# Altium PCB NNLightSwitcher.PcbDoc (part 3 of 3)
Units mil, origin at the board's own origin, x right, y up, seen from the top; angles counter-clockwise.
Board outline 1590 x 2535 mil, 2 copper layers (Top Layer, Bottom Layer); 347 components, 370 nets, 1639 pads, 0 vias.
Unrouted connection lines stored in the file: 1035.
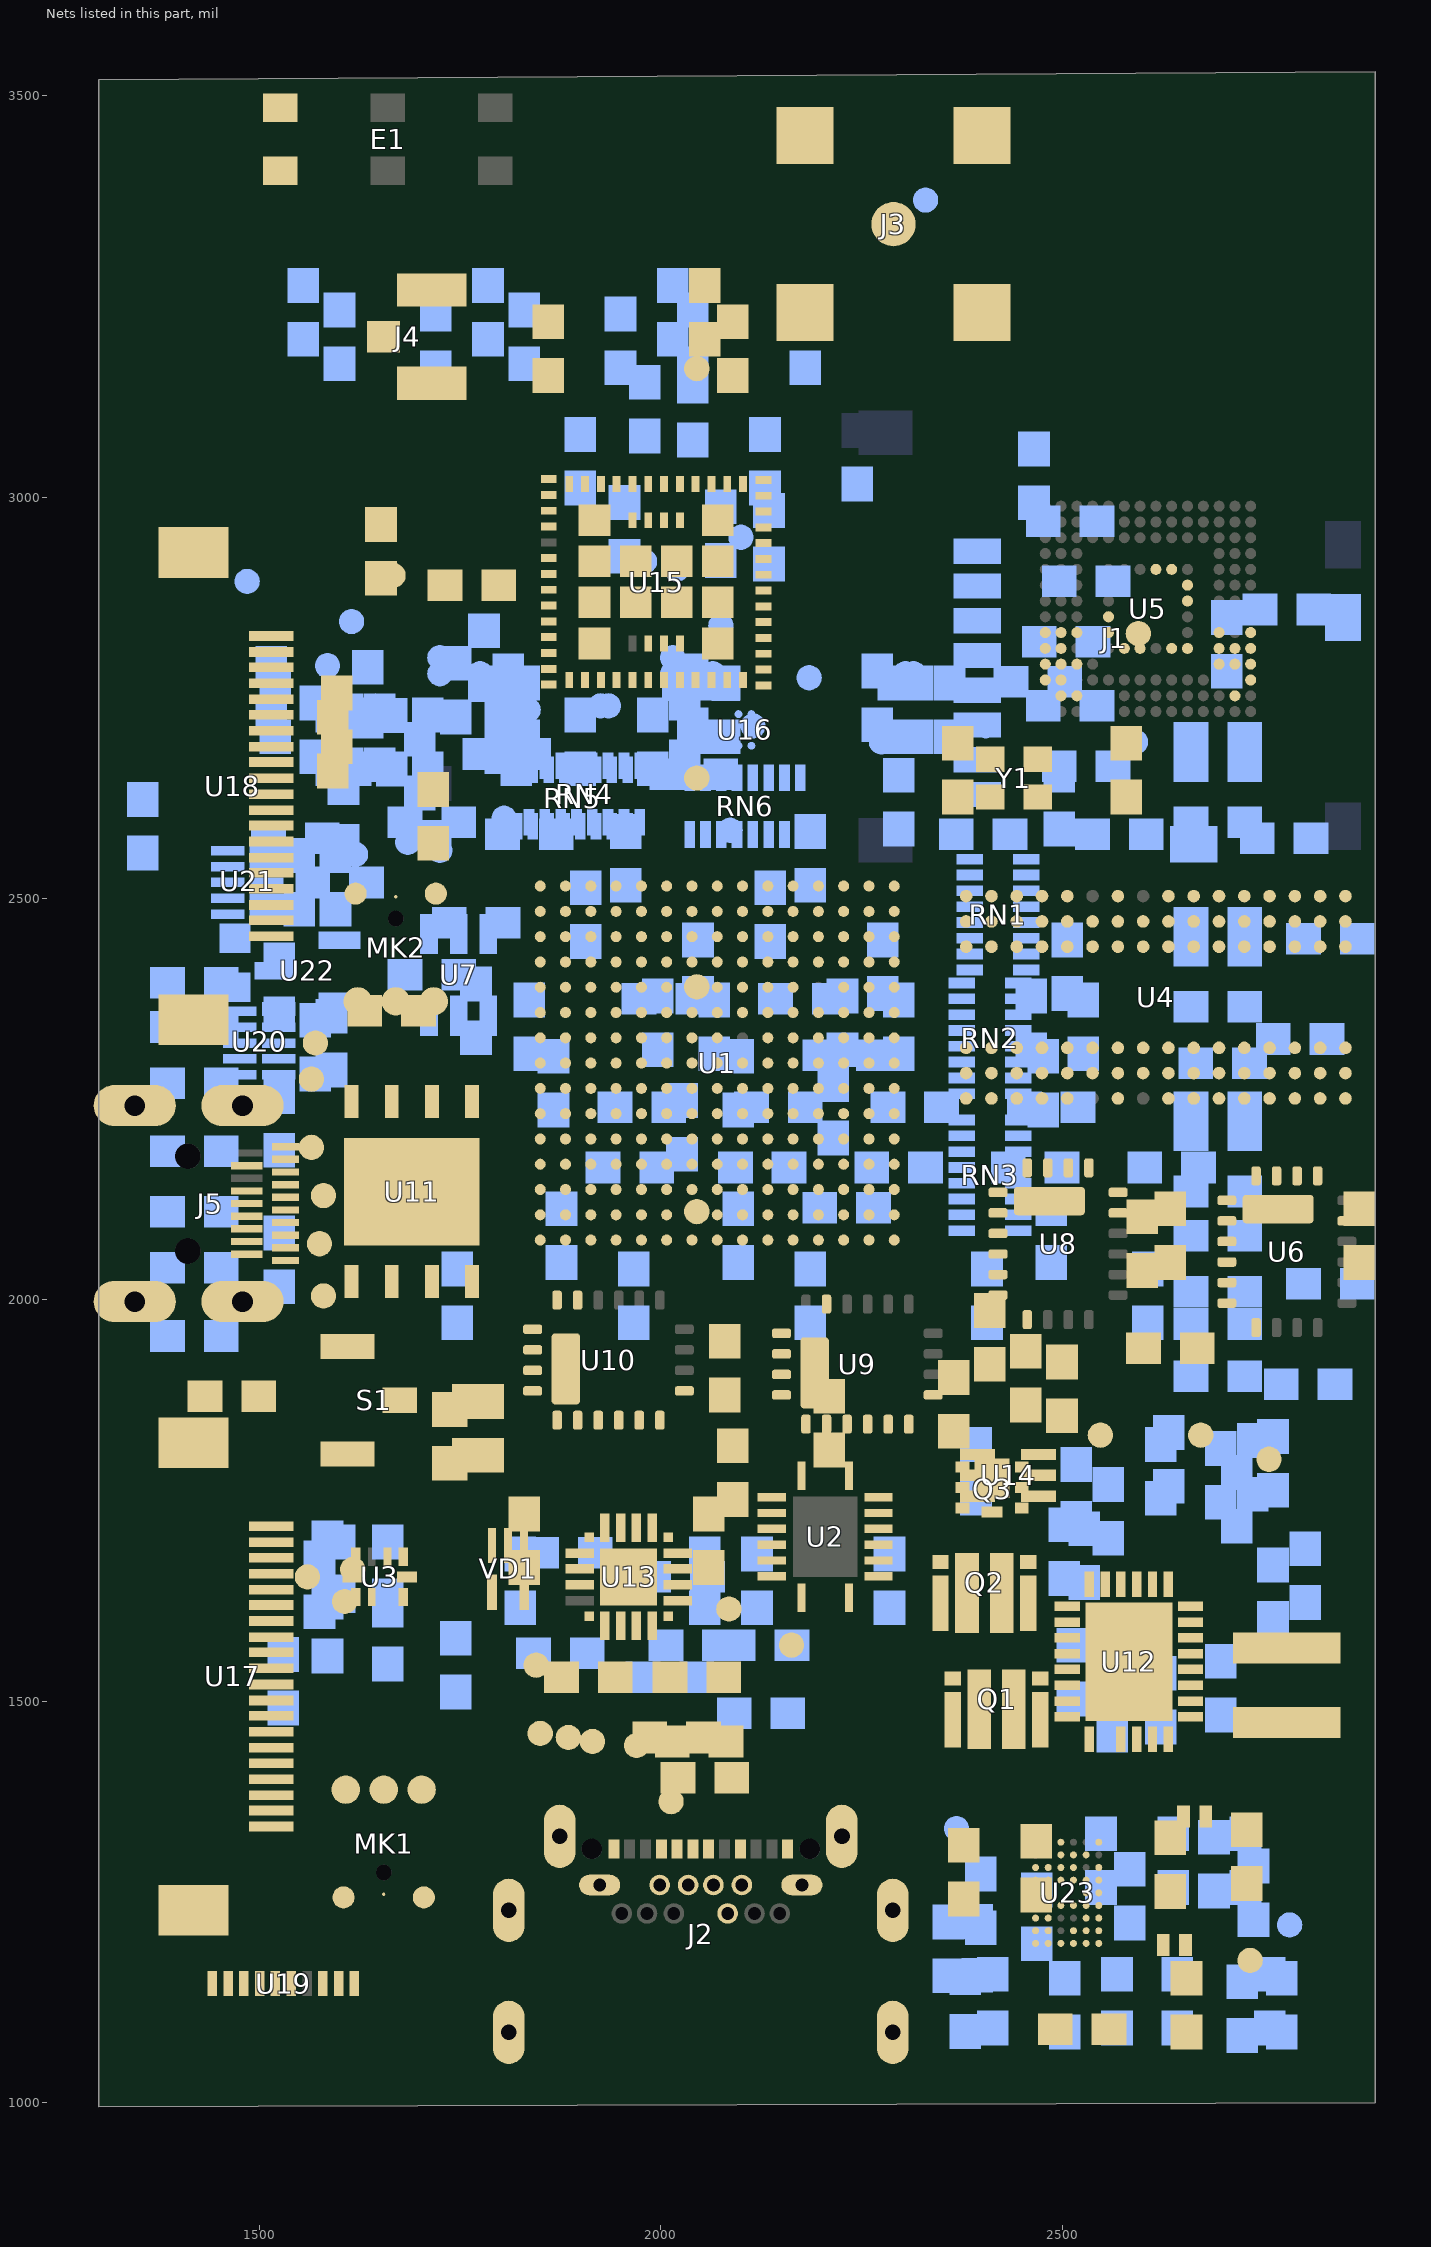
[diagram p2: the nets of this part, all layers, seen from the top]

## Nets (pads, with @x,y where several pads share a name; then routed paths per layer and width w, separated by ;. In a path a pad name is that pad's centre, name@x,y a point inside that pad or via, vN(x,y) a via of type N, cw(c..) or ccw(c..) an arc to the next point about the centre after c; other vN are vias at no path point) (continued)
"TMS Zynq": U1.L9 U19.2
"UART0 RXD": R53.2 U1.A13
"UART0 TXD": R54.2 U1.D14
"UART1 RXD": TP27.1 U1.C13 U15.45
"UART1 TXD": TP26.1 U1.A12 U15.46
"UART CTS USB": R56.2
"UART nCTS BLE": TP24.1 U15.48
"UART nRTS BLE": TP25.1 U15.47
"UART RTS USB": R55.2
USB_D_N: J2.A7 J2.B7 R67.1 VD1.5
USB_D_P: J2.A6 J2.B6 R66.1 VD1.3
VBATT: Q3.1 Q3.2 Q3.5 Q3.6 Q3.7 R65.1 U12.16
"VCC 1.0V": C29.1 C30.1 C31.1 C32.1 C33.1 C34.1 C35.1 R32.2 R44.2 TP10.1 U1.E10 U1.F9 U1.G6 U1.G10 U1.H5 U1.J10 U1.K5 U1.L10
"VCC 1.8V": C10.1 C11.1 C12.1 C13.1 C14.1 C15.1 C23.1 C24.1 L1.2 L3.1 R9.2 R41.2 TP9.1 U1.E6 U1.F11 U1.H9 U1.H15 U1.J6 U1.J8 U1.K9 U1.L6 U6.20
"VCC 1.35V": C4.1 C5.1 C6.1 C7.1 C8.1 R5.1 R6.2 R22.2 R40.2 TP11.1 U1.B3 U1.E4 U1.F1 U1.J2 U1.M3 U1.R4
"VCC 1.35V DDR3": C40.1 C42.1 C43.1 C44.1 C45.1 C46.1 C47.1 C48.1 C49.1 C50.1 C51.1 C52.1 C53.1 R22.1 U4.A1 U4.A8 U4.B2 U4.C1 U4.C9 U4.D2 U4.D9 U4.E9 U4.F1 U4.G7 U4.H2 U4.H9 U4.K2 U4.K8 U4.N1 U4.N9 U4.R1 U4.R9
"VCC 3.3V": C9.1 C16.2 C17.2 C18.1 C19.1 C21.1 C22.1 C69.1 C77.1 C78.1 C79.1 C80.1 C81.1 L2.2 R1.2 R10.2 R11.2 R30.1 R31.1 R33.2 R34.2 R35.2 R52.2 R64.2 R104.2 R107.1 R110.1 R111.1 R112.1 R113.1 R116.1 TP8.1 U1.A6 U1.B11 U1.B13 U1.C10 U1.D7 U1.E14 U1.F6 U1.G4 U1.H4 U1.J4 U1.K8 U2.16 U7.6 U11.8 U12.2 U17.21 U18.17 U18.18 U22.2
"VCC 3.3V eMMC": C54.1 C55.1 C56.1 C57.1 C58.1 C59.1 R30.2 U5.C2 U5.C6 U5.E6 U5.F5 U5.J10 U5.K9 U5.M4 U5.N4 U5.P3 U5.P5
"VCC 3.3V QSPI": R46.2 R51.2 R52.1
"VCC 3.3V SD": C60.1 L5.1 R23.1 R24.1 R25.1 R26.1 R28.1 R29.1 R31.2
"VCC 5V": C61.1 C63.1 C65.1 C67.1 C72.1 L6.2 TP12.1 U6.1 U6.2 U8.1 U8.2 U8.17 U8.18 U8.19 U8.20 U9.1 U9.2 U9.18 U9.20 U10.1 U10.2 U10.17 U10.18 U10.19 U10.20 U12.13 U12.21 U12.22 U13.6 U18.19 U18.20
"VCC Suply 3.3V WiFi": C93.1 C94.1 C95.1 R84.2 R85.2 R86.2 R87.2 R88.2 R100.1 R104.1 U15.11 U15.22 U15.23 U16.3
VTTREF: U4.H1 U4.M8
"VTTREF Zynq": C3.1 R6.1 R7.2 TP1.1 U1.F4
"WCH IRQ": R113.2 U23.C3
"WCH SCL": R111.2 U2.5 U23.A3
"WCH SDA": R112.2 U2.4 U23.B3
WiFi_ON: R106.1
"ZQ DDR3": R21.1 U4.L8
pads on no net: E1.2 E1.3 E1.4 E1.5 J1.P$1 J1.P$2 J1.P$3 J1.P$5 J2.A2 J2.A3 J2.A8 J2.A10 J2.A11 J2.B2 J2.B3 J2.B8 J2.B10 J2.B11 J2.None J4.2@1715,3259.06 J4.3@1715,3140.94 J5.14 J5.18 J5.None MK1.None MK2.None R75.2 R77.2 U1.J7 U1.L4 U2.17 U3.3 U3.8 U4.J1 U4.J9 U4.L1 U4.L9 U5.A1 U5.A2 U5.A7 U5.A8 U5.A9 U5.A10 U5.A11 U5.A12 U5.A13 U5.A14 U5.B1 U5.B7 U5.B8 U5.B9 U5.B10 U5.B11 U5.B12 U5.B13 U5.B14 U5.C1 U5.C3 U5.C5 U5.C7 U5.C8 U5.C9 U5.C10 U5.C11 U5.C12 U5.C13 U5.C14 U5.D1 U5.D2 U5.D3 U5.D4 U5.D12 U5.D13 U5.D14 U5.E1 U5.E2 U5.E3 U5.E5 U5.E8 U5.E9 U5.E10 U5.E12 U5.E13 U5.E14 U5.F1 U5.F2 U5.F3 U5.F10 U5.F12 U5.F13 U5.F14 U5.G1 U5.G2 U5.G3 U5.G10 U5.G12 U5.G13 U5.G14 U5.H1 U5.H2 U5.H3 U5.H5 U5.H12 U5.H13 U5.H14 U5.J1 U5.J2 U5.J3 U5.J12 U5.J13 U5.J14 U5.K1 U5.K2 U5.K3 U5.K6 U5.K7 U5.K10 U5.K12 U5.K13 U5.K14 U5.L1 U5.L2 U5.L3 U5.L12 U5.L13 U5.L14 U5.M1 U5.M2 U5.M3 U5.M7 U5.M8 U5.M9 U5.M10 U5.M11 U5.M12 U5.M13 U5.M14 U5.N1 U5.N3 U5.N6 U5.N7 U5.N8 U5.N9 U5.N10 U5.N11 U5.N12 U5.N13 U5.N14 U5.P1 U5.P2 U5.P7 U5.P8 U5.P9 U5.P10 U5.P11 U5.P12 U5.P13 U5.P14 U6.8 U6.9 U6.10 U6.11 U6.12 U6.13 U6.14 U6.16 U8.8 U8.9 U8.10 U8.11 U8.12 U8.13 U8.14 U9.8 U9.9 U9.10 U9.11 U9.12 U9.13 U9.14 U9.16 U10.8 U10.9 U10.10 U10.11 U10.12 U10.13 U10.14 U12.10 U13.10 U15.43 U15.54 U19.7 U23.A4 U23.A5 U23.B1 U23.B6 U23.C5 U23.G3 U23.G4 U23.H3

## Silkscreen, mask and mechanical layers (free items; w line width, h text height)
Mechanical 1:
  lines w10: 2890,1000 2890,3530 1300,3520 1300,995 2890,1000 ; 2890,1000 2890,1000

## Text inside footprints (layer, text, board x,y; h text height)
J5: Mechanical 4 "PCB EDGE" at 1273.82,2207.28 h50 r270; Mechanical 4 "PCB EDGE" at 1273.82,2207.28 h50 r270
U12: Top Overlay "*" at 2443.13,1593.69 h50; Mechanical 4 "*" at 2499.13,1593.69 h50; Mechanical 4 "*" at 2499.13,1593.69 h50
VD1: Top Overlay "1" at 1862.13,1719.13 h50 r270; Mechanical 1 "*" at 1825.16,1726 h50 r270